# Altium PCB Length Tuning Routing with CM.PcbDoc
Units mil, origin at the board's own origin, x right, y up, seen from the top; angles counter-clockwise.
Board outline 6000 x 4000 mil, 4 copper layers (Component Side, Ground Plane, Power Plane, Solder Side); 10 components, 17 nets, 432 pads, 0 vias.
Unrouted connection lines stored in the file: 101.
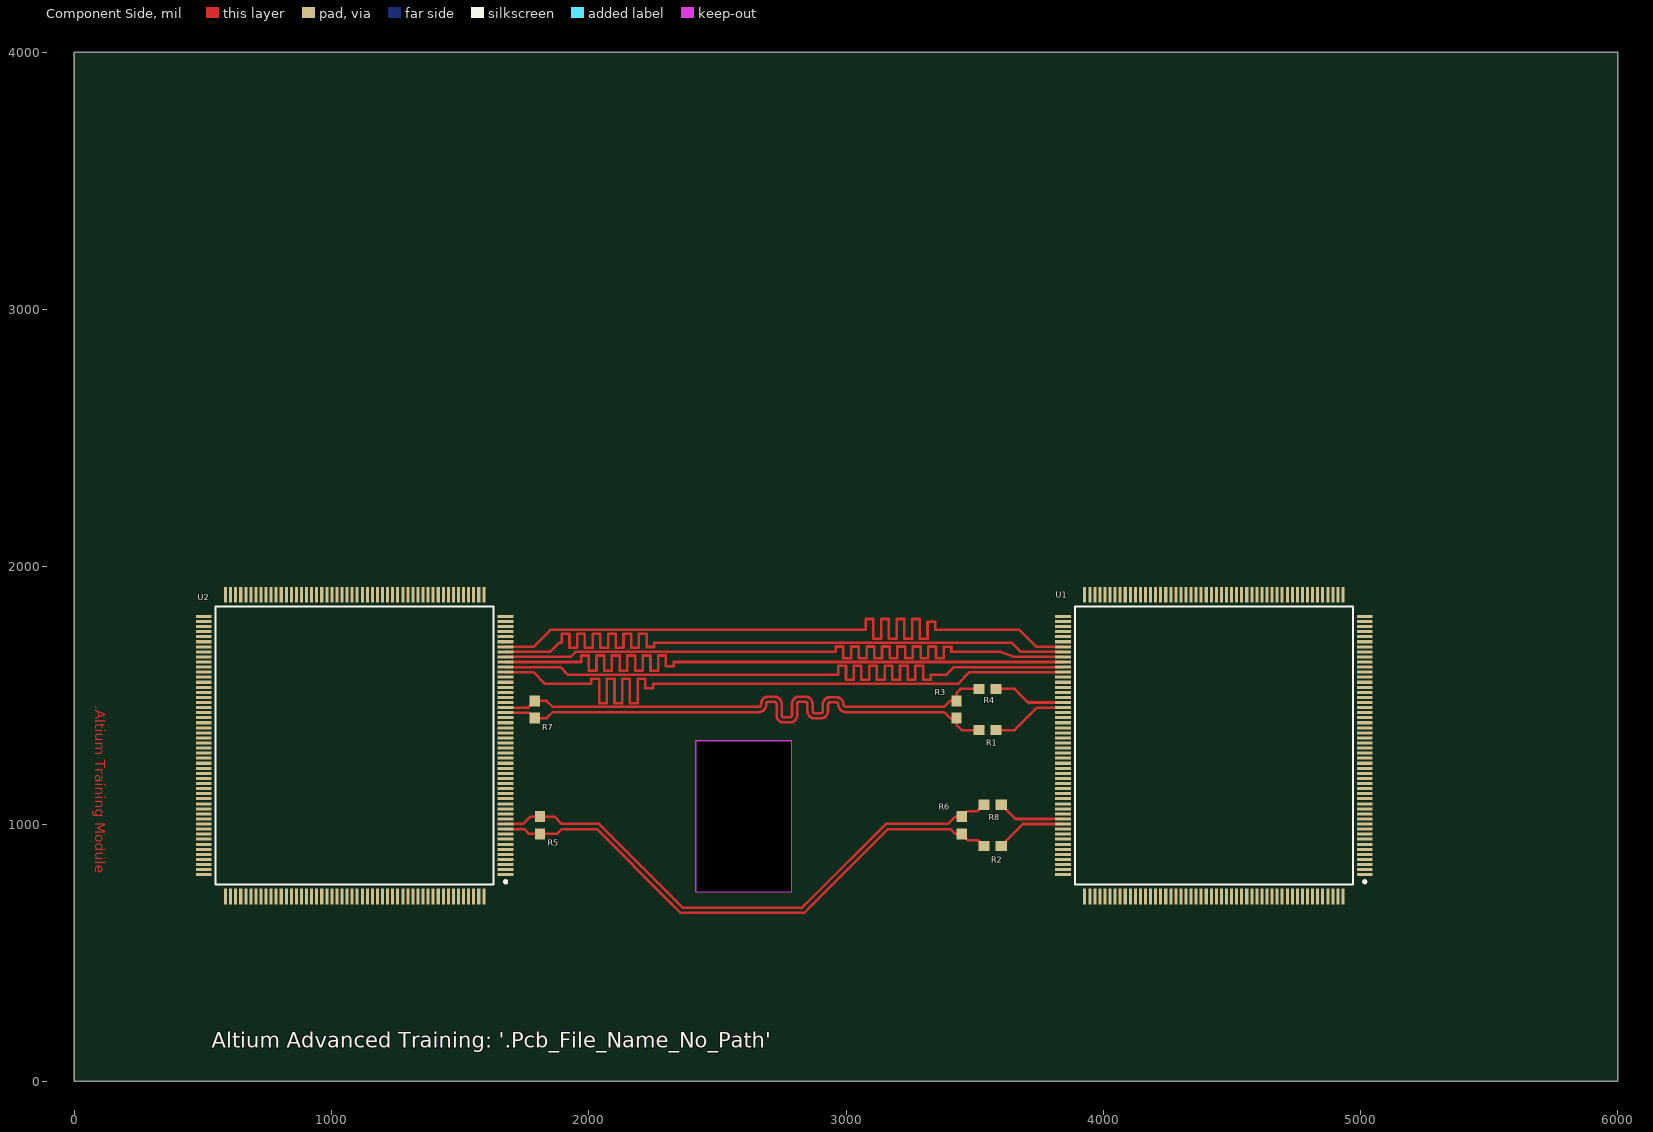
[diagram p0: Component Side view]
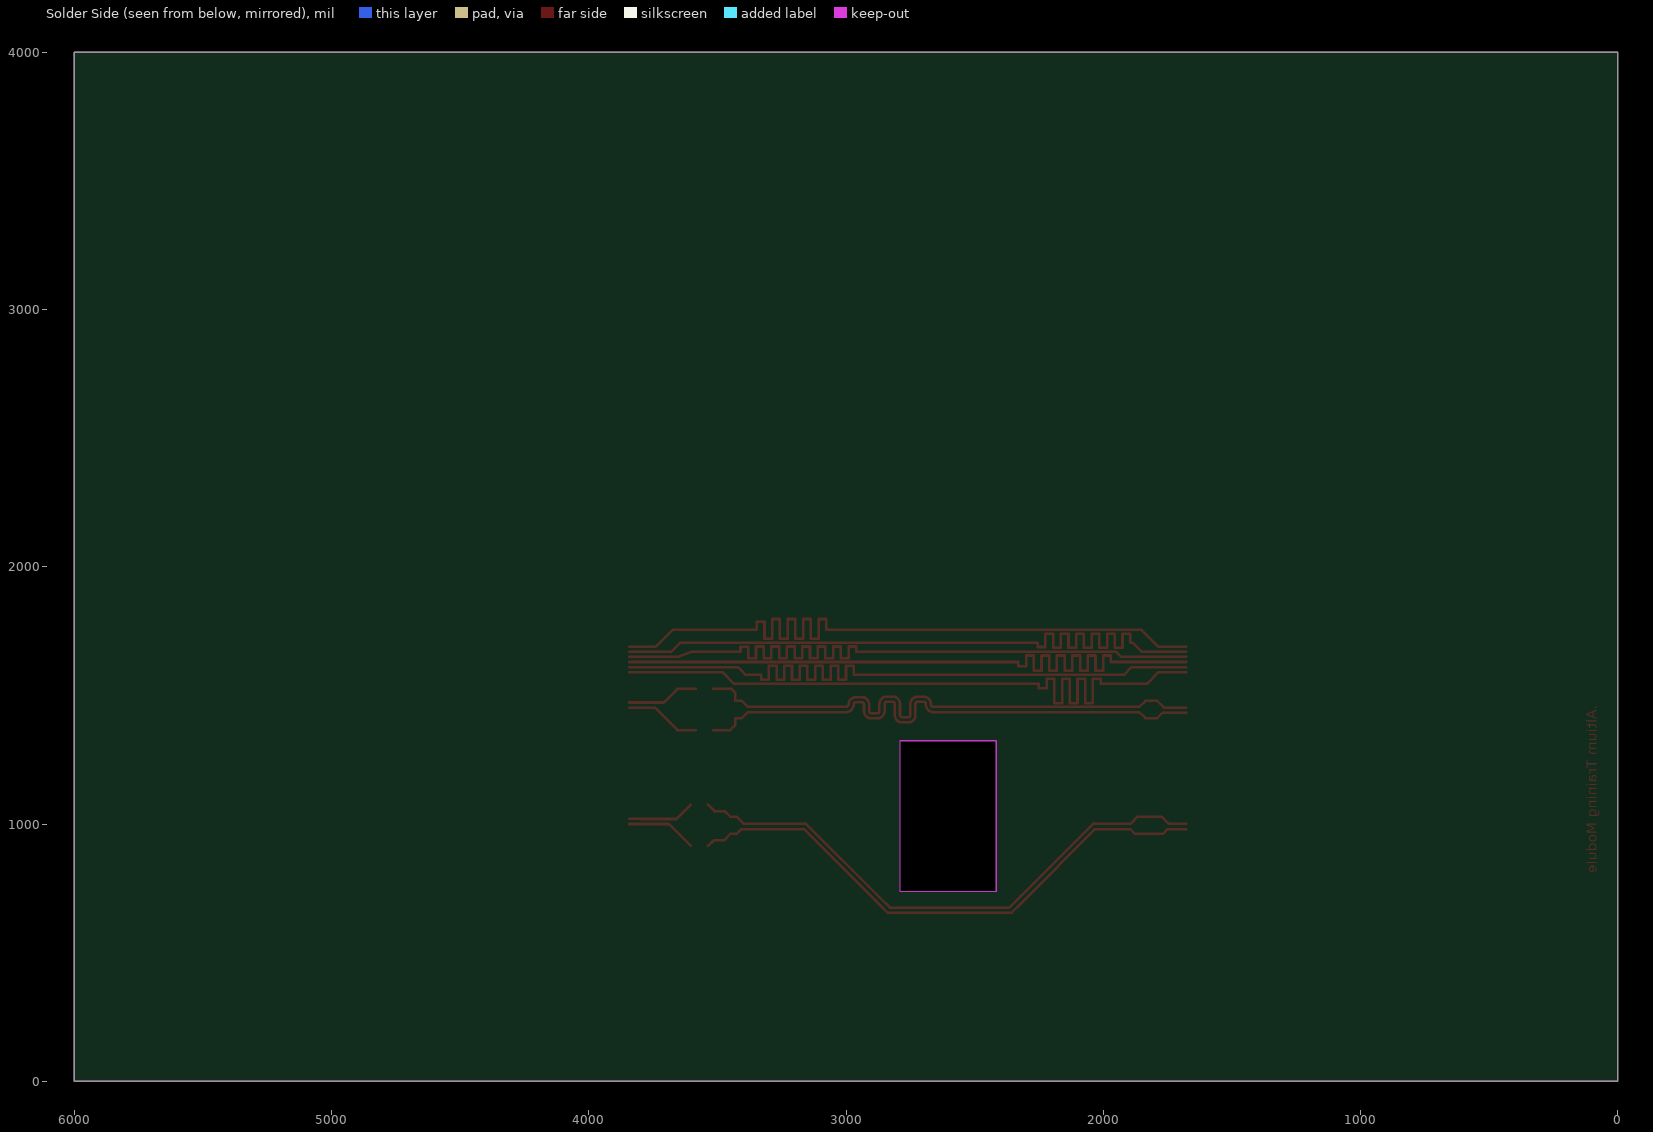
[diagram p1: Solder Side view, seen from below]
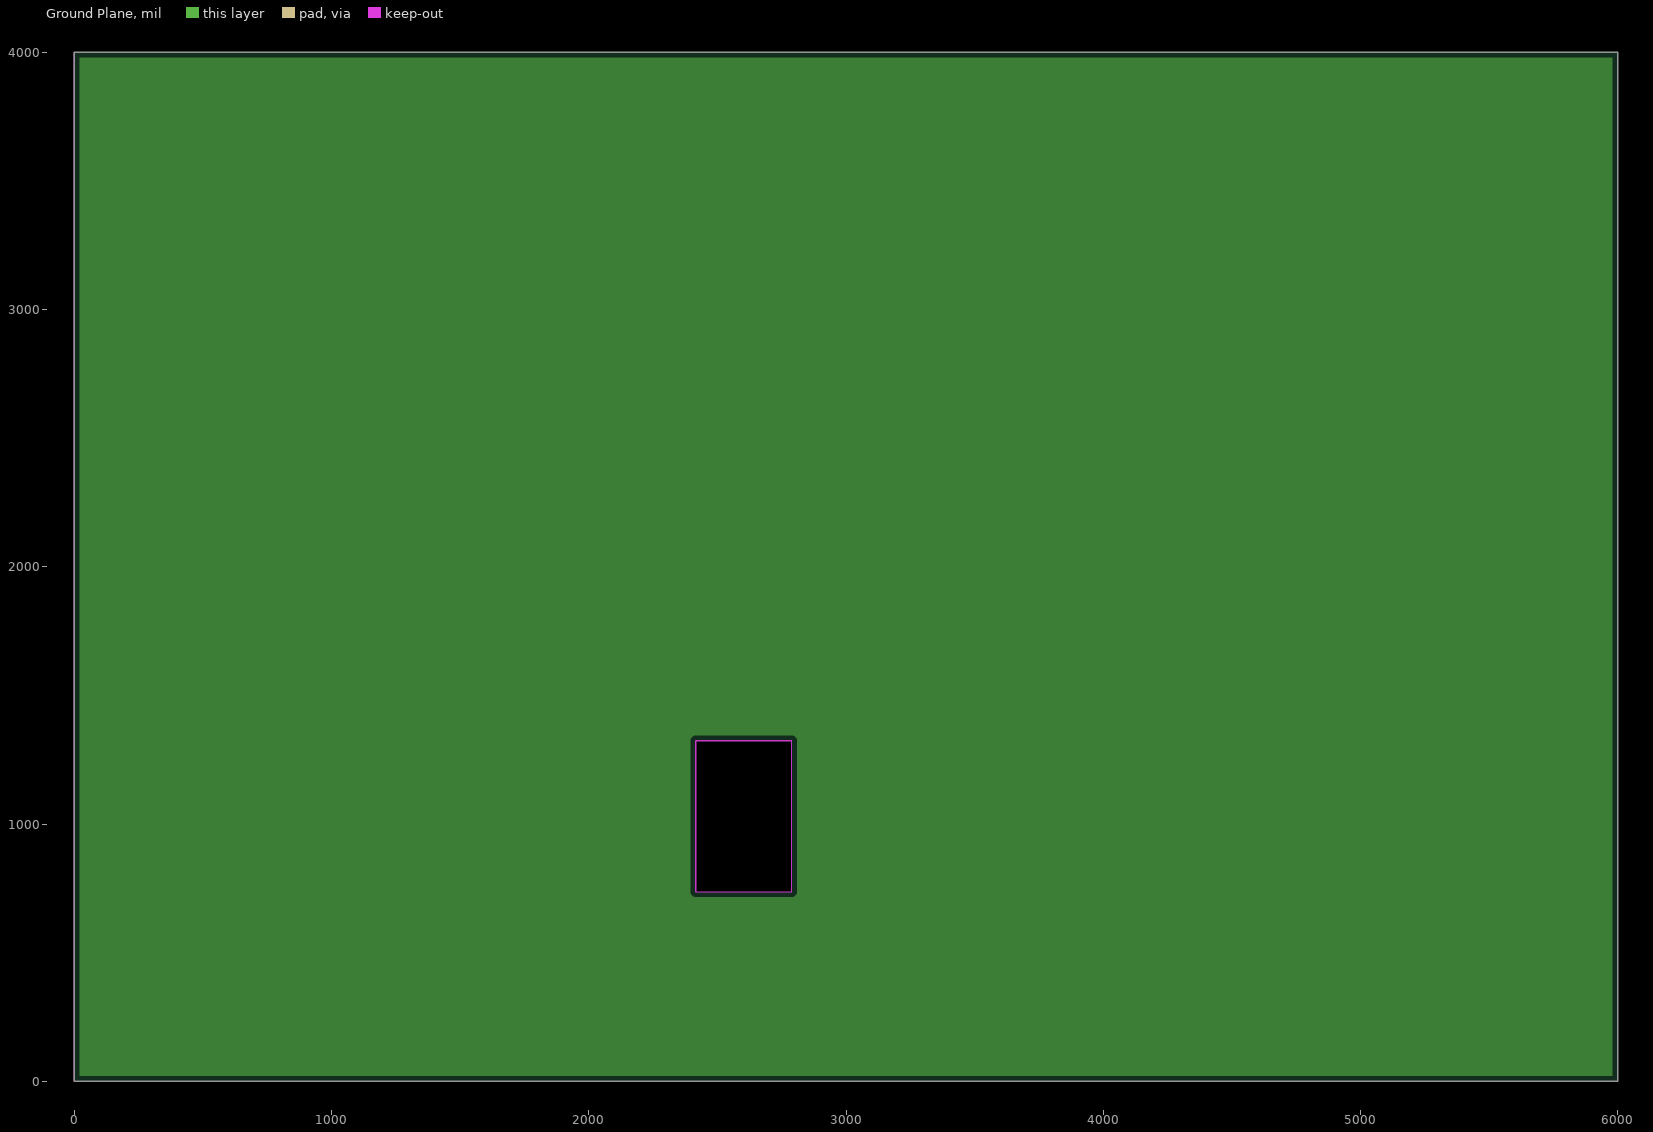
[diagram p2: Ground Plane, clearances drawn from the general rule]
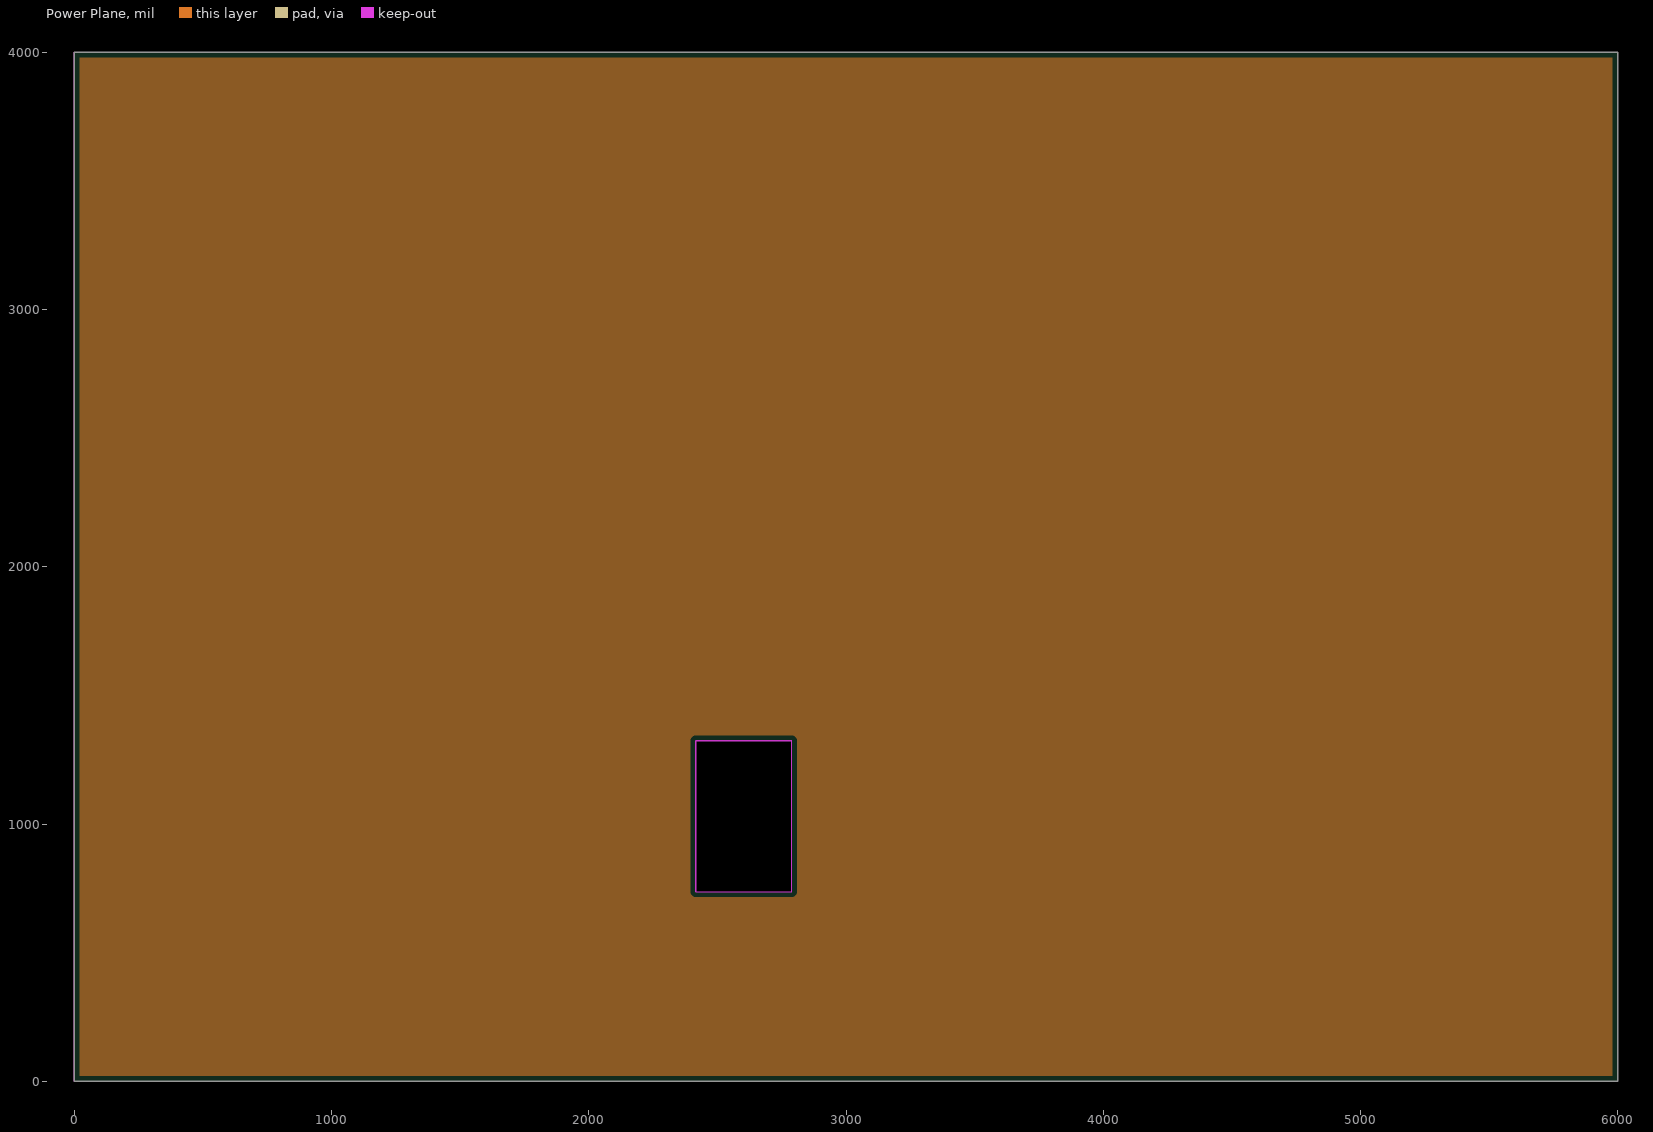
[diagram p3: Power Plane, clearances drawn from the general rule]

## Layer stack, top to bottom
Top Solder: solder mask 0.4, Solder Resist, Dk 3.5
Component Side: signal copper 1.4
Dielectric1: core 12.6, FR-4, Dk 4.8
Ground Plane: plane copper 1.4
Dielectric2: prepreg 12.6, FR-4, Dk 4.8
Power Plane: plane copper 1.4
Dielectric3: core 12.6, FR-4, Dk 4.8
Solder Side: signal copper 1.4
Bottom Solder: solder mask 0.4, Solder Resist, Dk 3.5

## Board outline
0,0 6000,0 6000,4000 0,4000
cut-out: 2416,736 2789,736 2789,1324 2416,1324

## Design rules (kind name [scope] priority, off if disabled: settings)
Clearance Clearance_1 [OnMid vs OnMid] p1: gap=5 ignorepadtopadclearanceinfootprint=FALSE except(0: Arc-Hole Track-Hole SMDPad-Hole THPad-Hole Via-Hole Fill-Hole Poly-Hole Region-Hole Text-Hole) sourcerule=47 cellrowname=All cellrowtype=0 cellcolname=All cellcoltype=0 innerlayers=TRUE
Clearance Clearance_2 [(ExistsOnLayer('Component Side') Or ExistsOnLayer('Solder Side')) vs (ExistsOnLayer('Component Side') Or ExistsOnLayer('Solder Side'))] p2: gap=5 ignorepadtopadclearanceinfootprint=FALSE except(0: Arc-Hole Track-Hole SMDPad-Hole THPad-Hole Via-Hole Fill-Hole Poly-Hole Region-Hole Text-Hole) sourcerule=47 cellrowname=All cellrowtype=0 cellcolname=All cellcoltype=0 outerlayers=TRUE
Clearance [All] p3: gap=5 ignorepadtopadclearanceinfootprint=FALSE except(0: Arc-Hole Track-Hole SMDPad-Hole THPad-Hole Via-Hole Fill-Hole Poly-Hole Region-Hole Text-Hole) ismatrix=TRUE
DiffPairsRouting "Schematic Differential Pairs Routing" [InDifferentialPairClass('All Differential Pairs')] p1: maxlimit=10 minlimit=10 mostfreqgap=10 toplayer_minwidth=10 toplayer_maxwidth=10 toplayer_prefwidth=10 bottomlayer_minwidth=10 bottomlayer_maxwidth=10 bottomlayer_prefwidth=10 maxuncoupledlength=500
DiffPairsRouting [All] p2: maxlimit=10 minlimit=10 mostfreqgap=10 toplayer_minwidth=15 toplayer_maxwidth=15 toplayer_prefwidth=15 bottomlayer_minwidth=15 bottomlayer_maxwidth=15 bottomlayer_prefwidth=15 maxuncoupledlength=500
FabricationTestPointUsage TestPointUsage [All] p1: valid=0 allowmultiple=FALSE
FabricationTestpoint Testpoint [All] p1: side=3 testpointundercomponent=TRUE minsize=40 maxsize=100 preferedsize=60 minholesize=0 maxholesize=40 preferedholesize=32 testpointgrid=1 allowsidetop=TRUE allowsidebottom=TRUE usegrid=TRUE gridtolerance=0.01
Length [InDifferentialPairClass('REC_DIFF')] p1: maxlimit=2200 minlimit=2100
Length Length_LINE [InNetClass('LINE')] p2: maxlimit=3200 minlimit=2800
MatchedLengths MatchedLengthsWithin [InDifferentialPairClass('REC_DIFF')] p1: tolerance=20 checknetsindiffpair=TRUE checkdiffpairvsdiffpair=FALSE checkxsignals=FALSE checkothers=FALSE
MatchedLengths MatchedLengthsBetween [InDifferentialPairClass('REC_DIFF')] p2: tolerance=50 checknetsindiffpair=FALSE checkdiffpairvsdiffpair=TRUE checkxsignals=TRUE checkothers=TRUE
MatchedLengths [InNetClass('LINE')] p3: tolerance=100 checknetsindiffpair=FALSE checkdiffpairvsdiffpair=TRUE checkxsignals=TRUE checkothers=TRUE
PlaneClearance [All] p1: clearance=20
PlaneConnect [All] p1: planeconnectstyle=Relief reliefexpansion=20 reliefentries=4 reliefconductorwidth=10 reliefairgap=10
PolygonConnect [All] p1: connectstyle=Relief reliefconductorwidth=10 reliefentries=4 polygonreliefangle="90 Angle" airgapwidth=10
RoutingVias [All] p1: holewidth=28 width=50 viastyle="Through Hole" minholewidth=28 minwidth=50 maxholewidth=28 maxwidth=50
SignalStimulus SignalStimulus_N [InNet('DRV_N')] p1: kind=1 level=1 starttime=10.00 stoptime=60.00 periodtime=100.0
SignalStimulus SignalStimulus_POS [InNet('DRV_P')] p2: kind=1 level=0 starttime=10.00 stoptime=60.00 periodtime=100.0
SolderMaskExpansion [All] p1: expansion=4 istentingtop=FALSE
SupplyNets SupplyNets_VCC2 [InNet('VCC1V8')] p1: voltage=0.000
SupplyNets SupplyNets_VCC1 [InNet('VCC')] p2: voltage=0.000
SupplyNets SupplyNets_GND [InNet('GND')] p3: voltage=0.000
Width [All] p1: maxlimit=10 minlimit=10 preferedwidth=10
25 further rules are at their usual default settings.

## Classes and differential pairs
differential pair class REC_DIFF: REC REC2
net class LINE: LINE1 LINE2 LINE3 LINE4 LINE5 LINE6
differential pair REC2: +REC2_P -REC2_N
differential pair DRV2: +DRV2_P -DRV2_N
differential pair REC: +REC_P -REC_N
differential pair DRV: +DRV_P -DRV_N

## Components (designator, comment, footprint, x,y, rotation, side; value= is the part's Value field where it differs from the comment)
R1 "Res3" J1-0603 3550,1365 r180 top value=165
R2 "Res3" J1-0603 3570,915 r180 top value=165
R3 "Res3" J1-0603 3430,1445 r270 top value=140
R4 "Res3" J1-0603 3550,1525 r0 top value=165
R5 "Res3" J1-0603 1810,995 r90 top value=100
R6 "Res3" J1-0603 3450,995 r270 top value=140
R7 "Res3" J1-0603 1790,1445 r90 top value=100
R8 "Res3" J1-0603 3570,1075 r0 top value=165
U1 "XC2S200E-6PQ208C" PQ208 4430,1305 r180 top
U2 "XC2S200E-6PQ208C" PQ208 1090,1305 r180 top

## Footprints (in the part's own frame and the unit in brackets; to place one, negate y for a bottom-side part, rotate by r counter-clockwise, add the part's x,y. Pads: shape width x height; smd on the part's side, far side on the other; paste and mask are expansions set on the pad)
J1-0603 [mm] "Chip Resistor; Body 1.6 x 0.8 mm (LxW typ)"
  rect 1.1x1 smd: 1(-0.85,0) 2(0.85,0)
PQ208 [mm] "208-Pin Plastic Quad Flat Pack (PQ208)"
  rect 1.55x0.3 smd: 1(-14.9,12.75) 2(-14.9,12.25) 3(-14.9,11.75) 4(-14.9,11.25) 5(-14.9,10.75) 6(-14.9,10.25) 7(-14.9,9.75) 8(-14.9,9.25) 9(-14.9,8.75) 10(-14.9,8.25) 11(-14.9,7.75) 12(-14.9,7.25) 13(-14.9,6.75) 14(-14.9,6.25) 15(-14.9,5.75) 16(-14.9,5.25) 17(-14.9,4.75) 18(-14.9,4.25) 19(-14.9,3.75) 20(-14.9,3.25) 21(-14.9,2.75) 22(-14.9,2.25) 23(-14.9,1.75) 24(-14.9,1.25) 25(-14.9,0.75) 26(-14.9,0.25) 27(-14.9,-0.25) 28(-14.9,-0.75) 29(-14.9,-1.25) 30(-14.9,-1.75) 31(-14.9,-2.25) 32(-14.9,-2.75) 33(-14.9,-3.25) 34(-14.9,-3.75) 35(-14.9,-4.25) 36(-14.9,-4.75) 37(-14.9,-5.25) 38(-14.9,-5.75) 39(-14.9,-6.25) 40(-14.9,-6.75) 41(-14.9,-7.25) 42(-14.9,-7.75) 43(-14.9,-8.25) 44(-14.9,-8.75) 45(-14.9,-9.25) 46(-14.9,-9.75) 47(-14.9,-10.25) 48(-14.9,-10.75) 49(-14.9,-11.25) 50(-14.9,-11.75) 51(-14.9,-12.25) 52(-14.9,-12.75) 105(14.9,-12.75) 106(14.9,-12.25) 107(14.9,-11.75) 108(14.9,-11.25) 109(14.9,-10.75) 110(14.9,-10.25) 111(14.9,-9.75) 112(14.9,-9.25) 113(14.9,-8.75) 114(14.9,-8.25) 115(14.9,-7.75) 116(14.9,-7.25) 117(14.9,-6.75) 118(14.9,-6.25) 119(14.9,-5.75) 120(14.9,-5.25) 121(14.9,-4.75) 122(14.9,-4.25) 123(14.9,-3.75) 124(14.9,-3.25) 125(14.9,-2.75) 126(14.9,-2.25) 127(14.9,-1.75) 128(14.9,-1.25) 129(14.9,-0.75) 130(14.9,-0.25) 131(14.9,0.25) 132(14.9,0.75) 133(14.9,1.25) 134(14.9,1.75) 135(14.9,2.25) 136(14.9,2.75) 137(14.9,3.25) 138(14.9,3.75) 139(14.9,4.25) 140(14.9,4.75) 141(14.9,5.25) 142(14.9,5.75) 143(14.9,6.25) 144(14.9,6.75) 145(14.9,7.25) 146(14.9,7.75) 147(14.9,8.25) 148(14.9,8.75) 149(14.9,9.25) 150(14.9,9.75) 151(14.9,10.25) 152(14.9,10.75) 153(14.9,11.25) 154(14.9,11.75) 155(14.9,12.25) 156(14.9,12.75)
  rect 0.3x1.55 smd: 53(-12.75,-14.9) 54(-12.25,-14.9) 55(-11.75,-14.9) 56(-11.25,-14.9) 57(-10.75,-14.9) 58(-10.25,-14.9) 59(-9.75,-14.9) 60(-9.25,-14.9) 61(-8.75,-14.9) 62(-8.25,-14.9) 63(-7.75,-14.9) 64(-7.25,-14.9) 65(-6.75,-14.9) 66(-6.25,-14.9) 67(-5.75,-14.9) 68(-5.25,-14.9) 69(-4.75,-14.9) 70(-4.25,-14.9) 71(-3.75,-14.9) 72(-3.25,-14.9) 73(-2.75,-14.9) 74(-2.25,-14.9) 75(-1.75,-14.9) 76(-1.25,-14.9) 77(-0.75,-14.9) 78(-0.25,-14.9) 79(0.25,-14.9) 80(0.75,-14.9) 81(1.25,-14.9) 82(1.75,-14.9) 83(2.25,-14.9) 84(2.75,-14.9) 85(3.25,-14.9) 86(3.75,-14.9) 87(4.25,-14.9) 88(4.75,-14.9) 89(5.25,-14.9) 90(5.75,-14.9) 91(6.25,-14.9) 92(6.75,-14.9) 93(7.25,-14.9) 94(7.75,-14.9) 95(8.25,-14.9) 96(8.75,-14.9) 97(9.25,-14.9) 98(9.75,-14.9) 99(10.25,-14.9) 100(10.75,-14.9) 101(11.25,-14.9) 102(11.75,-14.9) 103(12.25,-14.9) 104(12.75,-14.9) 157(12.75,14.9) 158(12.25,14.9) 159(11.75,14.9) 160(11.25,14.9) 161(10.75,14.9) 162(10.25,14.9) 163(9.75,14.9) 164(9.25,14.9) 165(8.75,14.9) 166(8.25,14.9) 167(7.75,14.9) 168(7.25,14.9) 169(6.75,14.9) 170(6.25,14.9) 171(5.75,14.9) 172(5.25,14.9) 173(4.75,14.9) 174(4.25,14.9) 175(3.75,14.9) 176(3.25,14.9) 177(2.75,14.9) 178(2.25,14.9) 179(1.75,14.9) 180(1.25,14.9) 181(0.75,14.9) 182(0.25,14.9) 183(-0.25,14.9) 184(-0.75,14.9) 185(-1.25,14.9) 186(-1.75,14.9) 187(-2.25,14.9) 188(-2.75,14.9) 189(-3.25,14.9) 190(-3.75,14.9) 191(-4.25,14.9) 192(-4.75,14.9) 193(-5.25,14.9) 194(-5.75,14.9) 195(-6.25,14.9) 196(-6.75,14.9) 197(-7.25,14.9) 198(-7.75,14.9) 199(-8.25,14.9) 200(-8.75,14.9) 201(-9.25,14.9) 202(-9.75,14.9) 203(-10.25,14.9) 204(-10.75,14.9) 205(-11.25,14.9) 206(-11.75,14.9) 207(-12.25,14.9) 208(-12.75,14.9)
  silkscreen extent -15.03,-13.72 13.72,13.72

## Part data
R1 R2 R3 R4 R5 R6 R7 R8: "Resistor", LatestRevisionDate=04-Mar-2005, LatestRevisionNote="PCB Footprint replaced.", PackageReference=J1-0603, Published=8-Jun-2000, Publisher="Altium Limited"
U1 U2: "Spartan-IIE 1.8V FPGA, 208-Pin PQFP, Standard Performance, Commercial Grade", Package Information="Latest Revision: ver1.1, Oct-2002", Package Reference=PQ208, Code - JEDEC=MS-029-FA-1, Datasheet="Latest Revision: 09-Jul-2003", Published=19-Jul-2002, Publisher="Altium Limited", Revision="17-Sep-2003: Pin names updated to match datasheet, ver2.1."

## Nets (pads, with @x,y where several pads share a name; then routed paths per layer and width w, separated by ;. In a path a pad name is that pad's centre, name@x,y a point inside that pad or via, vN(x,y) a via of type N, cw(c..) or ccw(c..) an arc to the next point about the centre after c; other vN are vias at no path point)
DRV2_N: R8.2 U1.145 | length 263
  Component Side w10: R8.2 3658.9,1019.57 3796.4,1019.57 3796.72,1019.88 U1.145@3843.39,1019.88
DRV2_P: R2.1 U1.146 | length 275.1
  Component Side w10: R2.1 3688.35,999.88 U1.146
DRV_N: R4.2 U1.122 | length 281.7
  Component Side w10: R4.2 3655,1525 3707.68,1472.32 U1.122
DRV_P: R1.1 U1.123 | length 296.2
  Component Side w10: R1.1 3655,1365 3742.64,1452.64 U1.123
GND: U1.1 U1.12 U1.19 U1.25 U1.32 U1.39 U1.51 U1.65 U1.72 U1.79 U1.85 U1.92 U1.103 U1.117 U1.124 U1.131 U1.137 U1.144 U1.158 U1.170 U1.177 U1.183 U1.190 U1.197 U2.1 U2.12 U2.19 U2.25 U2.32 U2.39 U2.51 U2.65 U2.72 U2.79 U2.85 U2.92 U2.103 U2.117 U2.124 U2.131 U2.137 U2.144 U2.158 U2.170 U2.177 U2.183 U2.190 U2.197
LINE1: U1.111 U2.46 | length 2900
  Component Side w10: U2.46 1785,1688.86 1851.14,1755 3071.73,1755 3076.73,1755 3076.73,1796.85 3106.73,1796.85 3106.73,1720 3136.73,1720 3136.73,1796.85 3166.73,1796.85 3166.73,1720 3196.73,1720 3196.73,1796.85 3226.73,1796.85 3226.73,1720 3256.73,1720 3256.73,1796.85 3286.73,1796.85 3286.73,1720 3316.73,1720 3316.73,1786.8 3346.73,1786.8 3346.73,1755 3673.86,1755 3705.07,1723.79 3740,1688.86 U1.111
LINE2: U1.112 U2.45 | length 2850
  Component Side w10: U2.45 1850,1669.17 1885.83,1705 1890,1705 1895,1705 1895,1740 1925,1740 1925,1685 1955,1685 1955,1740 1985,1740 1985,1685 2015,1685 2015,1740 2045,1740 2045,1685 2075,1685 2075,1740 2105,1740 2105,1685 2135,1685 2135,1740 2165,1740 2165,1685 2195,1685 2195,1740 2225,1740 2225,1688.22 2255,1688.22 2255,1705 2435,1705 2440,1705 3644.17,1705 3680,1669.17 U1.112
LINE3: U1.113 U2.44 | length 2850
  Component Side w10: U2.44 1930,1649.49 1950.51,1670 2955,1670 2960,1670 2960,1690 2990,1690 2990,1644.8 3020,1644.8 3020,1690 3050,1690 3050,1644.8 3080,1644.8 3080,1690 3110,1690 3110,1644.8 3140,1644.8 3140,1690 3170,1690 3170,1644.8 3200,1644.8 3200,1690 3230,1690 3230,1644.8 3260,1644.8 3260,1690 3290,1690 3290,1644.8 3320,1644.8 3320,1690 3350,1690 3350,1644.8 3380,1644.8 3380,1689.08 3410,1689.08 3410,1670 3599.49,1670 3652.5,1649.49 3657.5,1649.49 U1.113
LINE4: U1.114 U2.43 | length 2850
  Component Side w10: U2.43 1965,1629.8 1970,1629.8 1970,1655 2000,1655 2000,1595 2030,1595 2030,1655 2060,1655 2060,1595 2090,1595 2090,1655 2120,1655 2120,1595 2150,1595 2150,1655 2180,1655 2180,1595 2210,1595 2210,1655 2240,1655 2240,1595 2270,1595 2270,1655 2300,1655 2300,1613.39 2330,1613.39 2330,1629.8 2635,1629.8 2640,1629.8 U1.114
LINE5: U1.115 U2.42 | length 2850
  Component Side w10: U2.42 1890,1610.12 1920.12,1580 2965,1580 2970,1580 2970,1614.8 3000,1614.8 3000,1560 3030,1560 3030,1614.8 3060,1614.8 3060,1560 3090,1560 3090,1614.8 3120,1614.8 3120,1560 3150,1560 3150,1614.8 3180,1614.8 3180,1560 3210,1560 3210,1614.8 3240,1614.8 3240,1560 3270,1560 3270,1614.8 3300,1614.8 3300,1560 3330,1560 3330,1580.31 3360,1580.31 3360,1580 3390,1580 3400,1590 3420.12,1610.12 U1.115
LINE6: U1.116 U2.41 | length 2850
  Component Side w10: U2.41 1785,1590.43 1830.43,1545 2005,1545 2010,1545 2010,1565 2040,1565 2040,1470 2070,1470 2070,1565 2100,1565 2100,1470 2130,1470 2130,1565 2160,1565 2160,1470 2190,1470 2190,1565 2220,1565 2220,1527.21 2250,1527.21 2250,1545 2305,1545 2310,1545 3434.57,1545 3480,1590.43 U1.116
REC2_N: R5.2 R6.1 R8.1 U2.11 | length 2183.7
  Component Side w10: U2.11@1676.61,1000.2 1745.2,1000.2 1773.46,1028.46 R5.2 1866.54,1028.46 1894.8,1000.2 2039.8,1000.2 2320,720 2365,675 2590,675 2829.8,675 2870,715.2 3155,1000.2 3396.73,1000.2 3425,1028.46 R6.1 3471.54,1050 3511.54,1050 R8.1
REC2_P: R2.2 R5.1 R6.2 U2.10 | length 2171.8
  Component Side w10: U2.10 1749.8,980.2 1768.46,961.54 R5.1 1876.34,961.54 1895,980.2 2031.52,980.2 2320,691.72 2356.72,655 2375,655 2590,655 2838.09,655 2870,686.91 3163.28,980.2 3406.34,980.2 3425,961.54 R6.2 3475,936.54 3513.46,936.54 3520,930 3521.54,930 R2.2
REC_N: R3.1 R4.1 R7.2 U2.34 | length 2177.8
  Component Side w10: U2.34 1764.17,1452.64 R7.2 1836.54,1478.46 1860,1455 2645,1455 2660,1455 ccw(c2660,1465) 2670,1465 2670,1467 cw(c2698,1467) 2698,1495 2722,1495 cw(c2722,1467) 2750,1467 2750,1423 ccw(c2758,1423) 2758,1415 2782,1415 ccw(c2782,1423) 2790,1423 2790,1467 cw(c2818,1467) 2818,1495 2842,1495 cw(c2842,1467) 2870,1467 2870,1438.81 ccw(c2878,1438.81) 2878,1430.81 2902,1430.81 ccw(c2902,1438.81) 2910,1438.81 2910,1465 cw(c2938,1465) 2938,1493 2962,1493 cw(c2962,1465) 2990,1465 ccw(c3000,1465) 3000,1455 3215,1455 3381.54,1455 3405,1478.46 R3.1 3430,1510 3445,1525 R4.1
REC_P: R1.2 R3.2 R7.1 U2.33 | length 2173
  Component Side w10: U2.33 1768.58,1432.95 R7.1 1836.54,1411.54 1860,1435 2645,1435 2660,1435 ccw(c2660,1465) 2690,1465 2690,1467 cw(c2698,1467) 2698,1475 2722,1475 cw(c2722,1467) 2730,1467 2730,1423 ccw(c2758,1423) 2758,1395 2782,1395 ccw(c2782,1423) 2810,1423 2810,1467 cw(c2818,1467) 2818,1475 2842,1475 cw(c2842,1467) 2850,1467 2850,1438.81 ccw(c2878,1438.81) 2878,1410.81 2902,1410.81 ccw(c2902,1438.81) 2930,1438.81 2930,1465 cw(c2938,1465) 2938,1473 2962,1473 cw(c2962,1465) 2970,1465 ccw(c3000,1465) 3000,1435 3215,1435 3381.54,1435 3405,1411.54 R3.2 3430,1385 3450,1365 R1.2
VCC: U1.13 U1.26 U1.38 U1.53 U1.66 U1.78 U1.91 U1.105 U1.118 U1.130 U1.143 U1.156 U1.171 U1.184 U1.196 U1.208 U2.13 U2.26 U2.38 U2.53 U2.66 U2.78 U2.91 U2.105 U2.118 U2.130 U2.143 U2.156 U2.171 U2.184 U2.196 U2.208
VCC1V8: U1.14 U1.28 U1.37 U1.67 U1.76 U1.90 U1.119 U1.128 U1.142 U1.172 U1.186 U1.195 U2.14 U2.28 U2.37 U2.67 U2.76 U2.90 U2.119 U2.128 U2.142 U2.172 U2.186 U2.195
pads on no net: U1.2 U1.3 U1.4 U1.5 U1.6 U1.7 U1.8 U1.9 U1.10 U1.11 U1.15 U1.16 U1.17 U1.18 U1.20 U1.21 U1.22 U1.23 U1.24 U1.27 U1.29 U1.30 U1.31 U1.33 U1.34 U1.35 U1.36 U1.40 U1.41 U1.42 U1.43 U1.44 U1.45 U1.46 U1.47 U1.48 U1.49 U1.50 U1.52 U1.54 U1.55 U1.56 U1.57 U1.58 U1.59 U1.60 U1.61 U1.62 U1.63 U1.64 U1.68 U1.69 U1.70 U1.71 U1.73 U1.74 U1.75 U1.77 U1.80 U1.81 U1.82 U1.83 U1.84 U1.86 U1.87 U1.88 U1.89 U1.93 U1.94 U1.95 U1.96 U1.97 U1.98 U1.99 U1.100 U1.101 U1.102 U1.104 U1.106 U1.107 U1.108 U1.109 U1.110 U1.120 U1.121 U1.125 U1.126 U1.127 U1.129 U1.132 U1.133 U1.134 U1.135 U1.136 U1.138 U1.139 U1.140 U1.141 U1.147 U1.148 U1.149 U1.150 U1.151 U1.152 U1.153 U1.154 U1.155 U1.157 U1.159 U1.160 U1.161 U1.162 U1.163 U1.164 U1.165 U1.166 U1.167 U1.168 U1.169 U1.173 U1.174 U1.175 U1.176 U1.178 U1.179 U1.180 U1.181 U1.182 U1.185 U1.187 U1.188 U1.189 U1.191 U1.192 U1.193 U1.194 U1.198 U1.199 U1.200 U1.201 U1.202 U1.203 U1.204 U1.205 U1.206 U1.207 U2.2 U2.3 U2.4 U2.5 U2.6 U2.7 U2.8 U2.9 U2.15 U2.16 U2.17 U2.18 U2.20 U2.21 U2.22 U2.23 U2.24 U2.27 U2.29 U2.30 U2.31 U2.35 U2.36 U2.40 U2.47 U2.48 U2.49 U2.50 U2.52 U2.54 U2.55 U2.56 U2.57 U2.58 U2.59 U2.60 U2.61 U2.62 U2.63 U2.64 U2.68 U2.69 U2.70 U2.71 U2.73 U2.74 U2.75 U2.77 U2.80 U2.81 U2.82 U2.83 U2.84 U2.86 U2.87 U2.88 U2.89 U2.93 U2.94 U2.95 U2.96 U2.97 U2.98 U2.99 U2.100 U2.101 U2.102 U2.104 U2.106 U2.107 U2.108 U2.109 U2.110 U2.111 U2.112 U2.113 U2.114 U2.115 U2.116 U2.120 U2.121 U2.122 U2.123 U2.125 U2.126 U2.127 U2.129 U2.132 U2.133 U2.134 U2.135 U2.136 U2.138 U2.139 U2.140 U2.141 U2.145 U2.146 U2.147 U2.148 U2.149 U2.150 U2.151 U2.152 U2.153 U2.154 U2.155 U2.157 U2.159 U2.160 U2.161 U2.162 U2.163 U2.164 U2.165 U2.166 U2.167 U2.168 U2.169 U2.173 U2.174 U2.175 U2.176 U2.178 U2.179 U2.180 U2.181 U2.182 U2.185 U2.187 U2.188 U2.189 U2.191 U2.192 U2.193 U2.194 U2.198 U2.199 U2.200 U2.201 U2.202 U2.203 U2.204 U2.205 U2.206 U2.207

## Polygon pours and split planes (outlines as drawn)
GND on Ground Plane (split plane): 5979.9,20.1 20.1,20.1 20.1,3979.9 5979.9,3979.9
VCC on Power Plane (split plane): 5979.9,20.1 20.1,20.1 20.1,3979.9 5979.9,3979.9

## Keep-outs
Keep-Out Layer:
  lines w2: 0,0 6000,0 6000,4000 0,4000 0,0 ; 2416,736 2789,736 2789,1324 2416,1324 2416,736

## Other copper
Component Side:
  text ".Altium Training Module" at 81.66,1462.31 h40 r270

## Silkscreen, mask and mechanical layers (free items; w line width, h text height)
Top Overlay:
  text "Altium Advanced Training: '.Pcb_File_Name_No_Path'" at 535,129.99 h60
1_BOARD_OUTLINE:
  the board outline again, w25
21_TITLE_BLOCK:
  drawing of 113 lines, arcs and shapes, not listed
  text "DWG. NO." at 7165.69,6438.35 h30
  text "REV:" at 8175.69,6438.35 h30
  text "6" at -3008.07,6393.35 h70
  text "5" at -512.41,6393.35 h70
  text "4" at 1976.93,6393.35 h70
  text "3" at 4483.6,6393.35 h70
  text "2" at 6982.59,6393.35 h70
  text "1" at 9487.59,6393.35 h70
  text ".PCB_DWG_NO" at 7380.59,6348.35 h50
  text ".PCB_REV" at 8190.59,6348.35 h50
  text "T" at -4027.41,6250.96 h76
  text "H" at -3984.07,6250.96 h76
  text "I" at -3934.05,6250.96 h76
  text "S" at -3914.05,6250.96 h76
  text "D" at -3849.03,6250.96 h76
  text "O" at -3799.02,6250.96 h76
  text "C" at -3744.01,6250.96 h76
  text "U" at -3693.99,6250.96 h76
  text "M" at -3643.98,6250.96 h76
  text "E" at -3585.63,6250.96 h76
  text "N" at -3538.96,6250.96 h76
  text "T" at -3490.61,6250.96 h76
  text "A" at -3427.26,6250.96 h76
  text "N" at -3380.58,6250.96 h76
  text "D" at -3330.57,6250.96 h76
  text "T" at -3262.22,6250.96 h76
  text "H" at -3218.88,6250.96 h76
  text "E" at -3168.86,6250.96 h76
  text "D" at -3103.85,6250.96 h76
  text "A" at -3053.84,6250.96 h76
  text "T" at -3007.16,6250.96 h76
  text "A" at -2965.48,6250.96 h76
  text "D" at -2898.8,6250.96 h76
  text "I" at -2848.79,6250.96 h76
  text "S" at -2830.45,6250.96 h76
  text "C" at -2783.77,6250.96 h76
  text "L" at -2733.76,6250.96 h76
  text "O" at -2695.42,6250.96 h76
  text "S" at -2640.4,6250.96 h76
  text "E" at -2593.72,6250.96 h76
  text "D" at -2547.05,6250.96 h76
  text "H" at -2478.7,6250.96 h76
  text "E" at -2428.68,6250.96 h76
  text "R" at -2382,6250.96 h76
  text "E" at -2333.66,6250.96 h76
  text "I" at -2286.98,6250.96 h76
  text "N" at -2266.98,6250.96 h76
  text "O" at -2198.63,6250.96 h76
  text "R" at -2143.61,6250.96 h76
  text "REVISIONS" at 8400.59,6218.35 h60
  text "H" at -4027.41,6170.94 h76
  text "E" at -3977.4,6170.94 h76
  text "R" at -3930.72,6170.94 h76
  text "E" at -3880.71,6170.94 h76
  text "W" at -3835.7,6170.94 h76
  text "I" at -3767.35,6170.94 h76
  text "T" at -3749.01,6170.94 h76
  text "H" at -3705.66,6170.94 h76
  text "I" at -3637.31,6170.94 h76
  text "S" at -3617.31,6170.94 h76
  text "T" at -3552.29,6170.94 h76
  text "H" at -3508.95,6170.94 h76
  text "E" at -3458.94,6170.94 h76
  text "P" at -3393.92,6170.94 h76
  text "R" at -3347.24,6170.94 h76
  text "O" at -3297.23,6170.94 h76
  text "P" at -3243.18,6170.94 h76
  text "E" at -3196.5,6170.94 h76
  text "R" at -3149.83,6170.94 h76
  text "T" at -3101.48,6170.94 h76
  text "Y" at -3058.14,6170.94 h76
  text "O" at -2993.12,6170.94 h76
  text "F" at -2939.77,6170.94 h76
  text "A" at -2876.43,6170.94 h76
  text "L" at -2829.75,6170.94 h76
  text "T" at -2793.07,6170.94 h76
  text "I" at -2749.73,6170.94 h76
  text "U" at -2729.72,6170.94 h76
  text "M" at -2679.71,6170.94 h76
  text "L" at -2603.02,6170.94 h76
  text "I" at -2564.68,6170.94 h76
  text "M" at -2544.68,6170.94 h76
  text "I" at -2488,6170.94 h76
  text "T" at -2467.99,6170.94 h76
  text "E" at -2424.65,6170.94 h76
  text "D" at -2377.97,6170.94 h76
  text "A" at -2309.62,6170.94 h76
  text "N" at -2262.94,6170.94 h76
  text "D" at -2212.93,6170.94 h76
  text "M" at -2142.91,6170.94 h76
  text "A" at -2084.56,6170.94 h76
  text "Y" at -2039.55,6170.94 h76
  text "ZONE" at 6815.59,6093.35 h60
  text "REV" at 7145.59,6093.35 h60
  text "DATE" at 9565.59,6093.35 h60
  text "B" at -4027.41,6090.92 h76
  text "E" at -3980.73,6090.92 h76
  text "F" at -3914.05,6090.92 h76
  text "R" at -3870.7,6090.92 h76
  text "E" at -3820.69,6090.92 h76
  text "E" at -3775.68,6090.92 h76
  text "L" at -3729,6090.92 h76
  text "Y" at -3690.66,6090.92 h76
  text "D" at -3623.98,6090.92 h76
  text "I" at -3573.96,6090.92 h76
  text "S" at -3555.63,6090.92 h76
  text "T" at -3508.95,6090.92 h76
  text "R" at -3466.3,6090.92 h76
  text "I" at -3417.95,6090.92 h76
  text "B" at -3397.95,6090.92 h76
  text "U" at -3351.27,6090.92 h76
  text "T" at -3301.26,6090.92 h76
  text "E" at -3257.91,6090.92 h76
  text "D" at -3211.23,6090.92 h76
  text "I" at -3142.88,6090.92 h76
  text "N" at -3122.88,6090.92 h76
  text "W" at -3056.19,6090.92 h76
  text "H" at -2987.84,6090.92 h76
  text "O" at -2939.5,6090.92 h76
  text "L" at -2884.49,6090.92 h76
  text "E" at -2846.14,6090.92 h76
  text "." at -2799.46,6090.92 h76
  text "N" at -2761.12,6090.92 h76
  text "O" at -2711.11,6090.92 h76
  text "R" at -2636.09,6090.92 h76
  text "I" at -2587.75,6090.92 h76
  text "G" at -2567.74,6090.92 h76
  text "H" at -2512.73,6090.92 h76
  text "T" at -2464.38,6090.92 h76
  text "S" at -2421.04,6090.92 h76
  text "A" at -2356.02,6090.92 h76
  text "R" at -2309.34,6090.92 h76
  text "E" at -2259.33,6090.92 h76
  text "DESCRIPTION" at 8160.59,6088.35 h60
  text "APPROVED" at 10070.59,6088.35 h60
  text "R" at -4027.41,6010.9 h76
  text "E" at -3977.4,6010.9 h76
  text "S" at -3930.72,6010.9 h76
  text "E" at -3884.04,6010.9 h76
  text "R" at -3837.36,6010.9 h76
  text "V" at -3787.35,6010.9 h76
  text "E" at -3740.67,6010.9 h76
  text "D" at -3693.99,6010.9 h76
  text "O" at -3625.64,6010.9 h76
  text "R" at -3570.63,6010.9 h76
  text "E" at -3500.61,6010.9 h76
  text "X" at -3453.93,6010.9 h76
  text "P" at -3408.92,6010.9 h76
  text "R" at -3362.25,6010.9 h76
  text "E" at -3312.23,6010.9 h76
  text "S" at -3265.56,6010.9 h76
  text "S" at -3218.88,6010.9 h76
  text "O" at -3153.86,6010.9 h76
  text "R" at -3098.85,6010.9 h76
  text "I" at -3030.5,6010.9 h76
  text "M" at -3010.49,6010.9 h76
  text "P" at -2952.14,6010.9 h76
  text "L" at -2905.47,6010.9 h76
  text "I" at -2868.79,6010.9 h76
  text "E" at -2848.79,6010.9 h76
  text "D" at -2802.11,6010.9 h76
  text "W" at -2735.42,6010.9 h76
  text "A" at -2667.07,6010.9 h76
  text "R" at -2620.4,6010.9 h76
  text "A" at -2570.38,6010.9 h76
  text "N" at -2523.71,6010.9 h76
  text "T" at -2475.36,6010.9 h76
  text "E" at -2432.02,6010.9 h76
  text "E" at -2385.34,6010.9 h76
  text "G" at -2324.09,6010.9 h76
  text "I" at -2269.07,6010.9 h76
  text "V" at -2249.07,6010.9 h76
  text "E" at -2202.39,6010.9 h76
  text "N" at -2155.71,6010.9 h76
  text "." at -2107.37,6010.9 h76
  text "A" at 7175.59,5958.35 h60
  text "ORIGINAL" at 8235.59,5958.35 h60
  text "D" at -4164.41,5250.35 h70
  text "D" at 10635.59,5250.35 h70
  text "C" at -4164.41,2870.35 h70
  text "C" at 10635.59,2870.35 h70
  text "B" at -4164.41,495.35 h70
  text "B" at 10635.59,495.35 h70
  text "DWG. NO." at 10675.59,-101.75 h30 r270
  text ".PCB_DWG_NO" at 10585.59,-316.65 h50 r270
  text "REV:" at 10675.59,-1111.75 h30 r270
  text ".PCB_REV" at 10585.59,-1126.65 h50 r270
  text "PART NO." at 4610.59,-1166.65 h45
  text ".PCB_PART_NUMBER" at 4925.59,-1166.65 h45
  text "UNLESS OTHERWISE SPECIFIED DIMENSIONS" at 4630.59,-1271.65 h45
  text "APPROVALS" at 6286.59,-1273.75 h45
  text "DATE" at 7146.59,-1273.75 h45
  text "2175 SALK AVENUE" at 9365.59,-1276.65 h45
  text "AND TOLERANCE ARE IN INCHES AND" at 4685.59,-1346.65 h45
  text "DESIGNER:" at 5966.59,-1353.75 h45
  text "SUITE 200" at 9365.59,-1366.65 h45
  text "APPLY TO THE FINISHED PART" at 4795.59,-1416.65 h45
  text ".PCB_DESIGNER" at 6286.59,-1433.75 h60
  text ".PCB_DESIGNER_APP_DATE" at 7016.59,-1433.75 h40
  text "CARLSBAD, CA 92008" at 9365.59,-1456.66 h45
  text "TOLERANCE ON:" at 5035.59,-1541.65 h45
  text "USA" at 9365.59,-1546.65 h45
  text "ENGINEER:" at 5966.59,-1553.75 h45
  text ".PCB_ENGINEER_APP_DATE" at 7016.59,-1623.75 h40
  text "2 DEC. PLACE" at 4630.59,-1631.65 h40
  text "3 DEC. PLACE" at 5085.59,-1631.65 h40
  text "ANGLES" at 5620.59,-1631.65 h40
  text ".PCB_ENGINEER" at 6286.59,-1633.75 h60
  text "TITLE:" at 7480.59,-1651.65 h45
  text "CHECKER:" at 5966.59,-1753.75 h45
  text ".PCB_2_DEC_TOL" at 4685.59,-1786.65 h60
  text ".PCB_3_DEC_TOL" at 5120.59,-1786.65 h60
  text ".PCB_ANG_TOL" at 5585.59,-1786.65 h60
  text ".PCB_CHECKER_APP_DATE" at 7014.59,-1827.75 h40
  text ".PCB_CHECKER" at 6286.59,-1833.75 h60
  text "THIRD ANGLE PROJECTION" at 3857.59,-1846.75 h40
  text ".Pcb_File_Name_No_Path" at 7555.59,-1864.98 h100
  text "A" at -4164.41,-1874.65 h70
  text "A" at 10635.59,-1874.65 h70
  text "MATERIAL:" at 4630.59,-1929.75 h45
  text "REFERENCE DOCUMENTS" at 6346.59,-1973.75 h45
  text ".Altium Training Module" at 7560.59,-2026.65 h100
  text "BOM:" at 5966.59,-2073.75 h45
  text "SEE NOTES" at 4996.59,-2128.75 h60
  text ".DOC_NO_BOM" at 6286.59,-2163.75 h60
  text ".Altium Training" at 7560.59,-2226.65 h80
  text "ASSY DWG:" at 5966.59,-2263.75 h45
  text ".DOC_NO_ASSY_DWG" at 6286.59,-2353.75 h60
  text "SIZE:" at 7540.59,-2386.65 h45
  text "CAGE CODE:" at 7785.59,-2386.65 h45
  text "DWG NO:" at 8785.59,-2386.65 h45
  text "REV:" at 10345.59,-2386.65 h45
  text "FAB DWG:" at 5966.59,-2453.75 h45
  text ".PCB_DWG_NO" at 9010.59,-2526.65 h100
  text "B" at 7580.59,-2531.65 h100
  text ".DOC_NO_FAB_DWG" at 6286.59,-2538.75 h60
  text ".CAGE_CODE" at 7955.59,-2541.65 h100
  text ".PCB_REV" at 10325.78,-2553.32 h100
  text "SCHEMATIC:" at 5966.59,-2643.75 h45
  text "Modified DATE:" at 4622.59,-2644.75 h45
  text "SCALE:" at 7480.59,-2701.65 h45
  text "FILE NAME:" at 8085.59,-2701.75 h45
  text "SHEET:" at 9825.59,-2701.75 h45
  text ".ModifiedDate" at 5210.59,-2713.75 h60
  text ".Printout_Name" at -3983.41,-2723.65 h150
  text ".DOC_NO_SCH_DWG" at 6286.59,-2733.75 h60
  text ".PCB_FILE_NAME_NO_PATH" at 8428.59,-2746.75 h60
  text ".PCB_SCALE" at 7750.59,-2751.65 h60
  text "OF" at 10275.59,-2751.75 h45
  text "DOC-104 REV A" at -4039.41,-2818.75 h20
  text "6" at -3008.07,-2906.65 h70
  text "5" at -512.41,-2906.65 h70
  text "4" at 1976.93,-2906.65 h70
  text "3" at 4483.6,-2906.65 h70
  text "2" at 6982.59,-2906.65 h70
  text "1" at 9487.59,-2906.65 h70
22_TITLE_BLOCK_MIRRORED:
  drawing of 113 lines, arcs and shapes, not listed
  text "REV:" at -1654.51,6438.35 h30
  text "DWG. NO." at -644.51,6438.35 h30
  text "1" at -2966.41,6393.35 h70
  text "2" at -461.41,6393.35 h70
  text "3" at 2037.58,6393.35 h70
  text "4" at 4544.25,6393.35 h70
  text "5" at 7033.59,6393.35 h70
  text "6" at 9529.25,6393.35 h70
  text ".PCB_REV" at -1669.41,6348.35 h50
  text ".PCB_DWG_NO" at -859.41,6348.35 h50
  text "R" at 8664.79,6250.96 h76
  text "O" at 8719.81,6250.96 h76
  text "N" at 8788.16,6250.96 h76
  text "I" at 8808.16,6250.96 h76
  text "E" at 8854.84,6250.96 h76
  text "R" at 8903.19,6250.96 h76
  text "E" at 8949.86,6250.96 h76
  text "H" at 8999.88,6250.96 h76
  text "D" at 9068.23,6250.96 h76
  text "E" at 9114.9,6250.96 h76
  text "S" at 9161.58,6250.96 h76
  text "O" at 9216.6,6250.96 h76
  text "L" at 9254.94,6250.96 h76
  text "C" at 9304.95,6250.96 h76
  text "S" at 9351.63,6250.96 h76
  text "I" at 9369.97,6250.96 h76
  text "D" at 9419.98,6250.96 h76
  text "A" at 9486.66,6250.96 h76
  text "T" at 9528.34,6250.96 h76
  text "A" at 9575.02,6250.96 h76
  text "D" at 9625.03,6250.96 h76
  text "E" at 9690.05,6250.96 h76
  text "H" at 9740.06,6250.96 h76
  text "T" at 9783.4,6250.96 h76
  text "D" at 9851.75,6250.96 h76
  text "N" at 9901.76,6250.96 h76
  text "A" at 9948.44,6250.96 h76
  text "T" at 10011.79,6250.96 h76
  text "N" at 10060.14,6250.96 h76
  text "E" at 10106.81,6250.96 h76
  text "M" at 10165.16,6250.96 h76
  text "U" at 10215.17,6250.96 h76
  text "C" at 10265.19,6250.96 h76
  text "O" at 10320.2,6250.96 h76
  text "D" at 10370.21,6250.96 h76
  text "S" at 10435.23,6250.96 h76
  text "I" at 10455.23,6250.96 h76
  text "H" at 10505.25,6250.96 h76
  text "T" at 10548.59,6250.96 h76
  text "REVISIONS" at -1879.41,6218.35 h60
  text "Y" at 8560.73,6170.94 h76
  text "A" at 8605.74,6170.94 h76
  text "M" at 8664.09,6170.94 h76
  text "D" at 8734.11,6170.94 h76
  text "N" at 8784.12,6170.94 h76
  text "A" at 8830.8,6170.94 h76
  text "D" at 8899.15,6170.94 h76
  text "E" at 8945.83,6170.94 h76
  text "T" at 8989.17,6170.94 h76
  text "I" at 9009.18,6170.94 h76
  text "M" at 9065.86,6170.94 h76
  text "I" at 9085.86,6170.94 h76
  text "L" at 9124.21,6170.94 h76
  text "M" at 9200.89,6170.94 h76
  text "U" at 9250.9,6170.94 h76
  text "I" at 9270.91,6170.94 h76
  text "T" at 9314.25,6170.94 h76
  text "L" at 9350.93,6170.94 h76
  text "A" at 9397.61,6170.94 h76
  text "F" at 9460.95,6170.94 h76
  text "O" at 9514.3,6170.94 h76
  text "Y" at 9579.32,6170.94 h76
  text "T" at 9622.66,6170.94 h76
  text "R" at 9671.01,6170.94 h76
  text "E" at 9717.68,6170.94 h76
  text "P" at 9764.36,6170.94 h76
  text "O" at 9818.41,6170.94 h76
  text "R" at 9868.42,6170.94 h76
  text "P" at 9915.1,6170.94 h76
  text "E" at 9980.12,6170.94 h76
  text "H" at 10030.13,6170.94 h76
  text "T" at 10073.47,6170.94 h76
  text "S" at 10138.49,6170.94 h76
  text "I" at 10158.49,6170.94 h76
  text "H" at 10226.84,6170.94 h76
  text "T" at 10270.19,6170.94 h76
  text "I" at 10288.53,6170.94 h76
  text "W" at 10356.88,6170.94 h76
  text "E" at 10401.89,6170.94 h76
  text "R" at 10451.9,6170.94 h76
  text "E" at 10498.58,6170.94 h76
  text "H" at 10548.59,6170.94 h76
  text "DATE" at -3044.41,6093.35 h60
  text "REV" at -624.41,6093.35 h60
  text "ZONE" at -294.41,6093.35 h60
  text "E" at 8780.51,6090.92 h76
  text "R" at 8830.52,6090.92 h76
  text "A" at 8877.2,6090.92 h76
  text "S" at 8942.22,6090.92 h76
  text "T" at 8985.56,6090.92 h76
  text "H" at 9033.91,6090.92 h76
  text "G" at 9088.92,6090.92 h76
  text "I" at 9108.93,6090.92 h76
  text "R" at 9157.27,6090.92 h76
  text "O" at 9232.29,6090.92 h76
  text "N" at 9282.3,6090.92 h76
  text "." at 9320.65,6090.92 h76
  text "E" at 9367.32,6090.92 h76
  text "L" at 9405.67,6090.92 h76
  text "O" at 9460.68,6090.92 h76
  text "H" at 9509.03,6090.92 h76
  text "W" at 9577.38,6090.92 h76
  text "N" at 9644.06,6090.92 h76
  text "I" at 9664.06,6090.92 h76
  text "D" at 9732.41,6090.92 h76
  text "E" at 9779.09,6090.92 h76
  text "T" at 9822.44,6090.92 h76
  text "U" at 9872.45,6090.92 h76
  text "B" at 9919.13,6090.92 h76
  text "I" at 9939.13,6090.92 h76
  text "R" at 9987.48,6090.92 h76
  text "T" at 10030.13,6090.92 h76
  text "S" at 10076.81,6090.92 h76
  text "I" at 10095.15,6090.92 h76
  text "D" at 10145.16,6090.92 h76
  text "Y" at 10211.84,6090.92 h76
  text "L" at 10250.18,6090.92 h76
  text "E" at 10296.86,6090.92 h76
  text "E" at 10341.87,6090.92 h76
  text "R" at 10391.88,6090.92 h76
  text "F" at 10435.23,6090.92 h76
  text "E" at 10501.91,6090.92 h76
  text "B" at 10548.59,6090.92 h76
  text "APPROVED" at -3549.41,6088.35 h60
  text "DESCRIPTION" at -1639.41,6088.35 h60
  text "." at 8628.55,6010.9 h76
  text "N" at 8676.89,6010.9 h76
  text "E" at 8723.57,6010.9 h76
  text "V" at 8770.25,6010.9 h76
  text "I" at 8790.25,6010.9 h76
  text "G" at 8845.27,6010.9 h76
  text "E" at 8906.52,6010.9 h76
  text "E" at 8953.2,6010.9 h76
  text "T" at 8996.54,6010.9 h76
  text "N" at 9044.89,6010.9 h76
  text "A" at 9091.57,6010.9 h76
  text "R" at 9141.58,6010.9 h76
  text "A" at 9188.26,6010.9 h76
  text "W" at 9256.61,6010.9 h76
  text "D" at 9323.29,6010.9 h76
  text "E" at 9369.97,6010.9 h76
  text "I" at 9389.97,6010.9 h76
  text "L" at 9426.65,6010.9 h76
  text "P" at 9473.33,6010.9 h76
  text "M" at 9531.67,6010.9 h76
  text "I" at 9551.68,6010.9 h76
  text "R" at 9620.03,6010.9 h76
  text "O" at 9675.04,6010.9 h76
  text "S" at 9740.06,6010.9 h76
  text "S" at 9786.74,6010.9 h76
  text "E" at 9833.41,6010.9 h76
  text "R" at 9883.43,6010.9 h76
  text "P" at 9930.1,6010.9 h76
  text "X" at 9975.12,6010.9 h76
  text "E" at 10021.79,6010.9 h76
  text "R" at 10091.81,6010.9 h76
  text "O" at 10146.82,6010.9 h76
  text "D" at 10215.17,6010.9 h76
  text "E" at 10261.85,6010.9 h76
  text "V" at 10308.53,6010.9 h76
  text "R" at 10358.54,6010.9 h76
  text "E" at 10405.22,6010.9 h76
  text "S" at 10451.9,6010.9 h76
  text "E" at 10498.58,6010.9 h76
  text "R" at 10548.59,6010.9 h76
  text "ORIGINAL" at -1714.41,5958.35 h60
  text "A" at -654.41,5958.35 h60
  text "D" at -4114.41,5250.35 h70
  text "D" at 10685.59,5250.35 h70
  text "C" at -4114.41,2870.35 h70
  text "C" at 10685.59,2870.35 h70
  text "B" at -4114.41,495.35 h70
  text "B" at 10685.59,495.35 h70
  text "DWG. NO." at -4154.41,-101.75 h30 r90
  text ".PCB_DWG_NO" at -4064.41,-316.65 h50 r90
  text "REV:" at -4154.41,-1111.75 h30 r90
  text ".PCB_REV" at -4064.41,-1126.65 h50 r90
  text ".PCB_PART_NUMBER" at 1595.59,-1166.65 h45
  text "PART NO." at 1910.59,-1166.65 h45
  text "UNLESS OTHERWISE SPECIFIED DIMENSIONS" at 1890.59,-1271.65 h45
  text "DATE" at -625.41,-1273.75 h45
  text "APPROVALS" at 234.59,-1273.75 h45
  text "2175 SALK AVENUE" at -2844.41,-1276.65 h45
  text "AND TOLERANCE ARE IN INCHES AND" at 1835.59,-1346.65 h45
  text "DESIGNER:" at 554.59,-1353.75 h45
  text "SUITE 200" at -2844.41,-1366.65 h45
  text "APPLY TO THE FINISHED PART" at 1725.59,-1416.65 h45
  text ".PCB_DESIGNER_APP_DATE" at -497.41,-1433.75 h40
  text ".PCB_DESIGNER" at 232.59,-1433.75 h60
  text "CARLSBAD, CA 92008" at -2844.41,-1456.66 h45
  text "TOLERANCE ON:" at 1485.59,-1541.65 h45
  text "USA" at -2844.41,-1546.65 h45
  text "ENGINEER:" at 554.59,-1553.75 h45
  text ".PCB_ENGINEER_APP_DATE" at -497.41,-1623.75 h40
  text "ANGLES" at 900.59,-1631.65 h40
  text "3 DEC. PLACE" at 1435.59,-1631.65 h40
  text "2 DEC. PLACE" at 1890.59,-1631.65 h40
  text ".PCB_ENGINEER" at 232.59,-1633.75 h60
  text "TITLE:" at -959.41,-1651.65 h45
  text "CHECKER:" at 554.59,-1753.75 h45
  text ".PCB_ANG_TOL" at 935.59,-1786.65 h60
  text ".PCB_3_DEC_TOL" at 1400.59,-1786.65 h60
  text ".PCB_2_DEC_TOL" at 1835.59,-1786.65 h60
  text ".Pcb_File_Name_No_Path" at -1099.41,-1826.65 h100
  text ".PCB_CHECKER_APP_DATE" at -495.41,-1827.75 h40
  text ".PCB_CHECKER" at 232.59,-1833.75 h60
  text "THIRD ANGLE PROJECTION" at 2663.59,-1846.75 h40
  text "A" at -4114.41,-1874.65 h70
  text "A" at 10685.59,-1874.65 h70
  text "MATERIAL:" at 1890.59,-1929.75 h45
  text "REFERENCE DOCUMENTS" at 174.59,-1973.75 h45
  text ".Altium Training Module" at -1099.41,-2026.65 h100
  text "BOM:" at 554.59,-2073.75 h45
  text "SEE NOTES" at 1524.59,-2128.75 h60
  text ".DOC_NO_BOM" at 234.59,-2163.75 h60
  text ".Altium Training" at -1099.41,-2226.65 h80
  text "ASSY DWG:" at 554.59,-2263.75 h45
  text ".DOC_NO_ASSY_DWG" at 234.59,-2353.75 h60
  text "REV:" at -3824.41,-2386.65 h45
  text "DWG NO:" at -2264.41,-2386.65 h45
  text "CAGE CODE:" at -1264.41,-2386.65 h45
  text "SIZE:" at -1019.41,-2386.65 h45
  text "FAB DWG:" at 554.59,-2453.75 h45
  text ".PCB_DWG_NO" at -2489.41,-2526.65 h100
  text "B" at -1059.41,-2531.65 h100
  text ".DOC_NO_FAB_DWG" at 234.59,-2538.75 h60
  text ".CAGE_CODE" at -1434.41,-2541.65 h100
  text ".PCB_REV" at -3804.6,-2548.32 h100
  text "SCHEMATIC:" at 554.59,-2643.75 h45
  text "PRINT DATE:" at 1898.59,-2644.75 h45
  text "SHEET:" at -3304.41,-2701.75 h45
  text "FILE NAME:" at -1564.41,-2701.75 h45
  text "SCALE:" at -959.41,-2701.65 h45
  text ".PRINT_DATE" at 1490.59,-2713.75 h60
  text ".Printout_Name" at 10504.59,-2723.65 h150
  text ".DOC_NO_SCH_DWG" at 234.59,-2733.75 h60
  text ".PCB_FILE_NAME_NO_PATH" at -1907.41,-2746.75 h60
  text "OF" at -3754.41,-2751.75 h45
  text ".PCB_SCALE" at -1229.41,-2751.65 h60
  text "DOC-104 REV A" at 10560.59,-2818.75 h20
  text "1" at -2966.41,-2906.65 h70
  text "2" at -461.41,-2906.65 h70
  text "3" at 2037.58,-2906.65 h70
  text "4" at 4544.25,-2906.65 h70
  text "5" at 7033.59,-2906.65 h70
  text "6" at 9529.25,-2906.65 h70